# EAGLE board Main_PCB_Prototype_v9 (EAGLE 9.7.0)
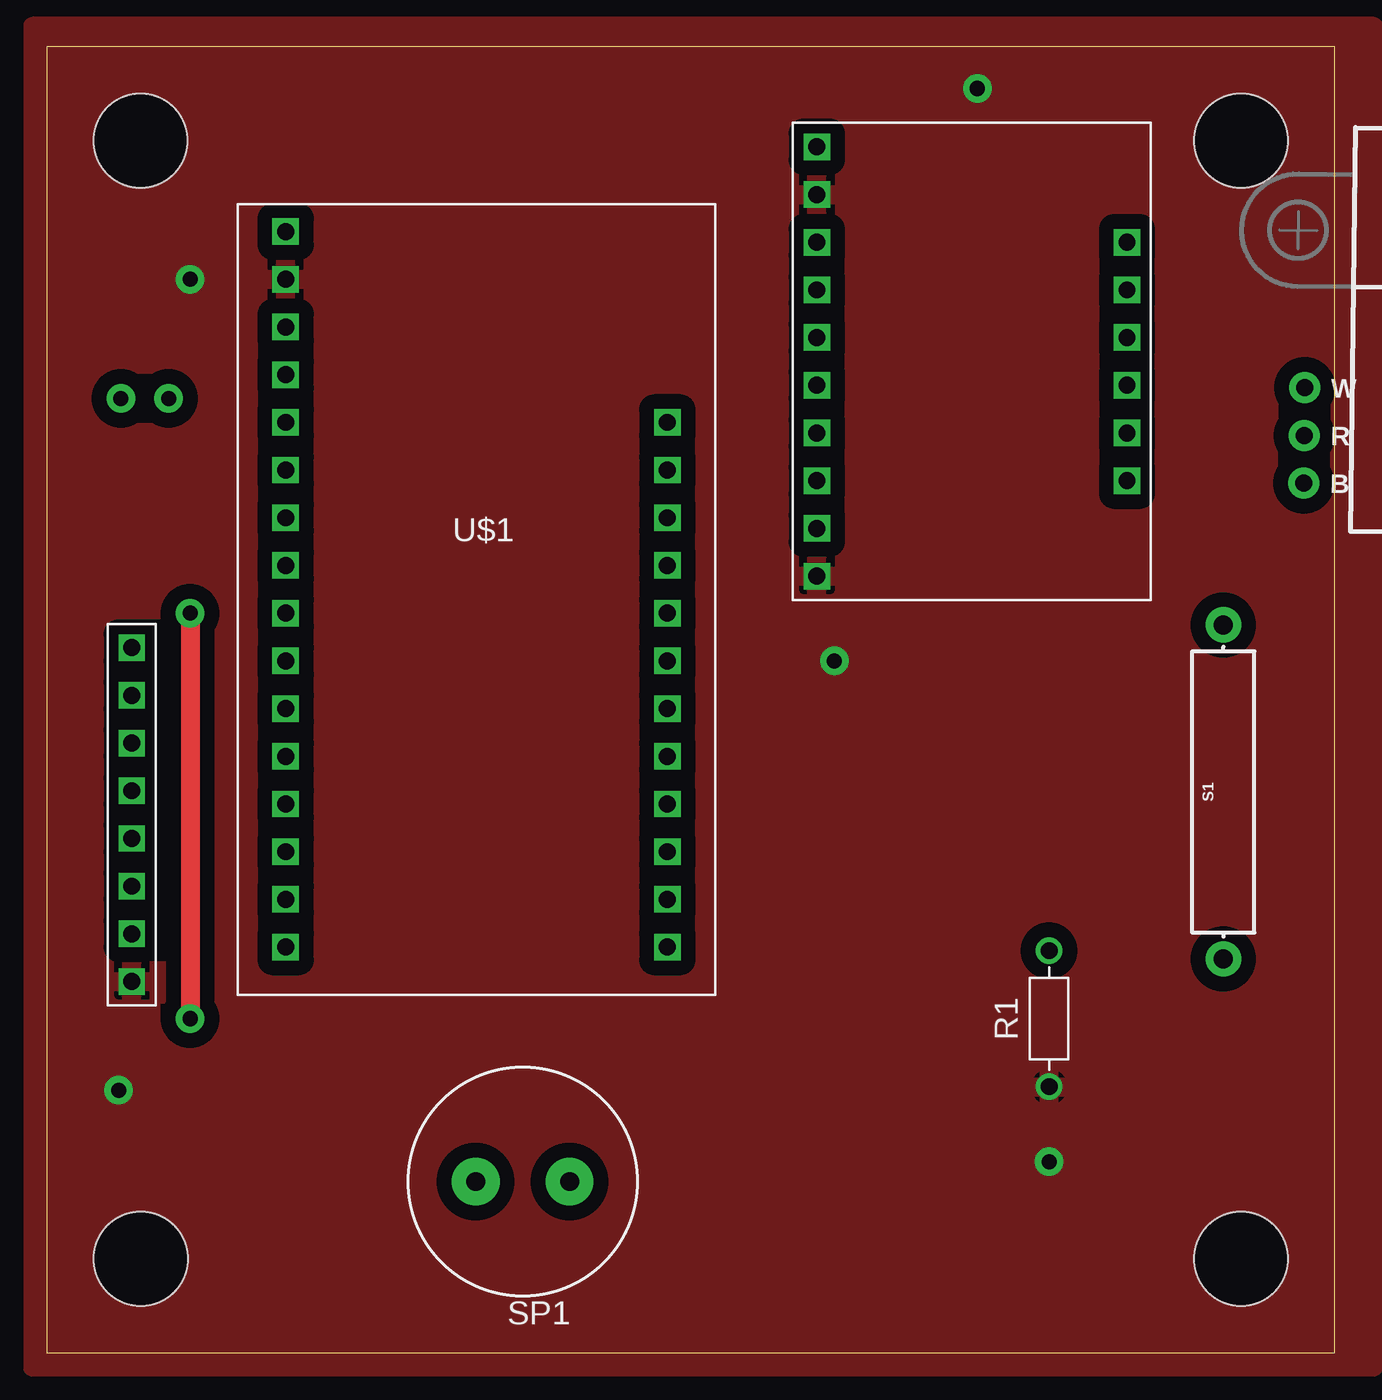
[diagram p0: board, top side]
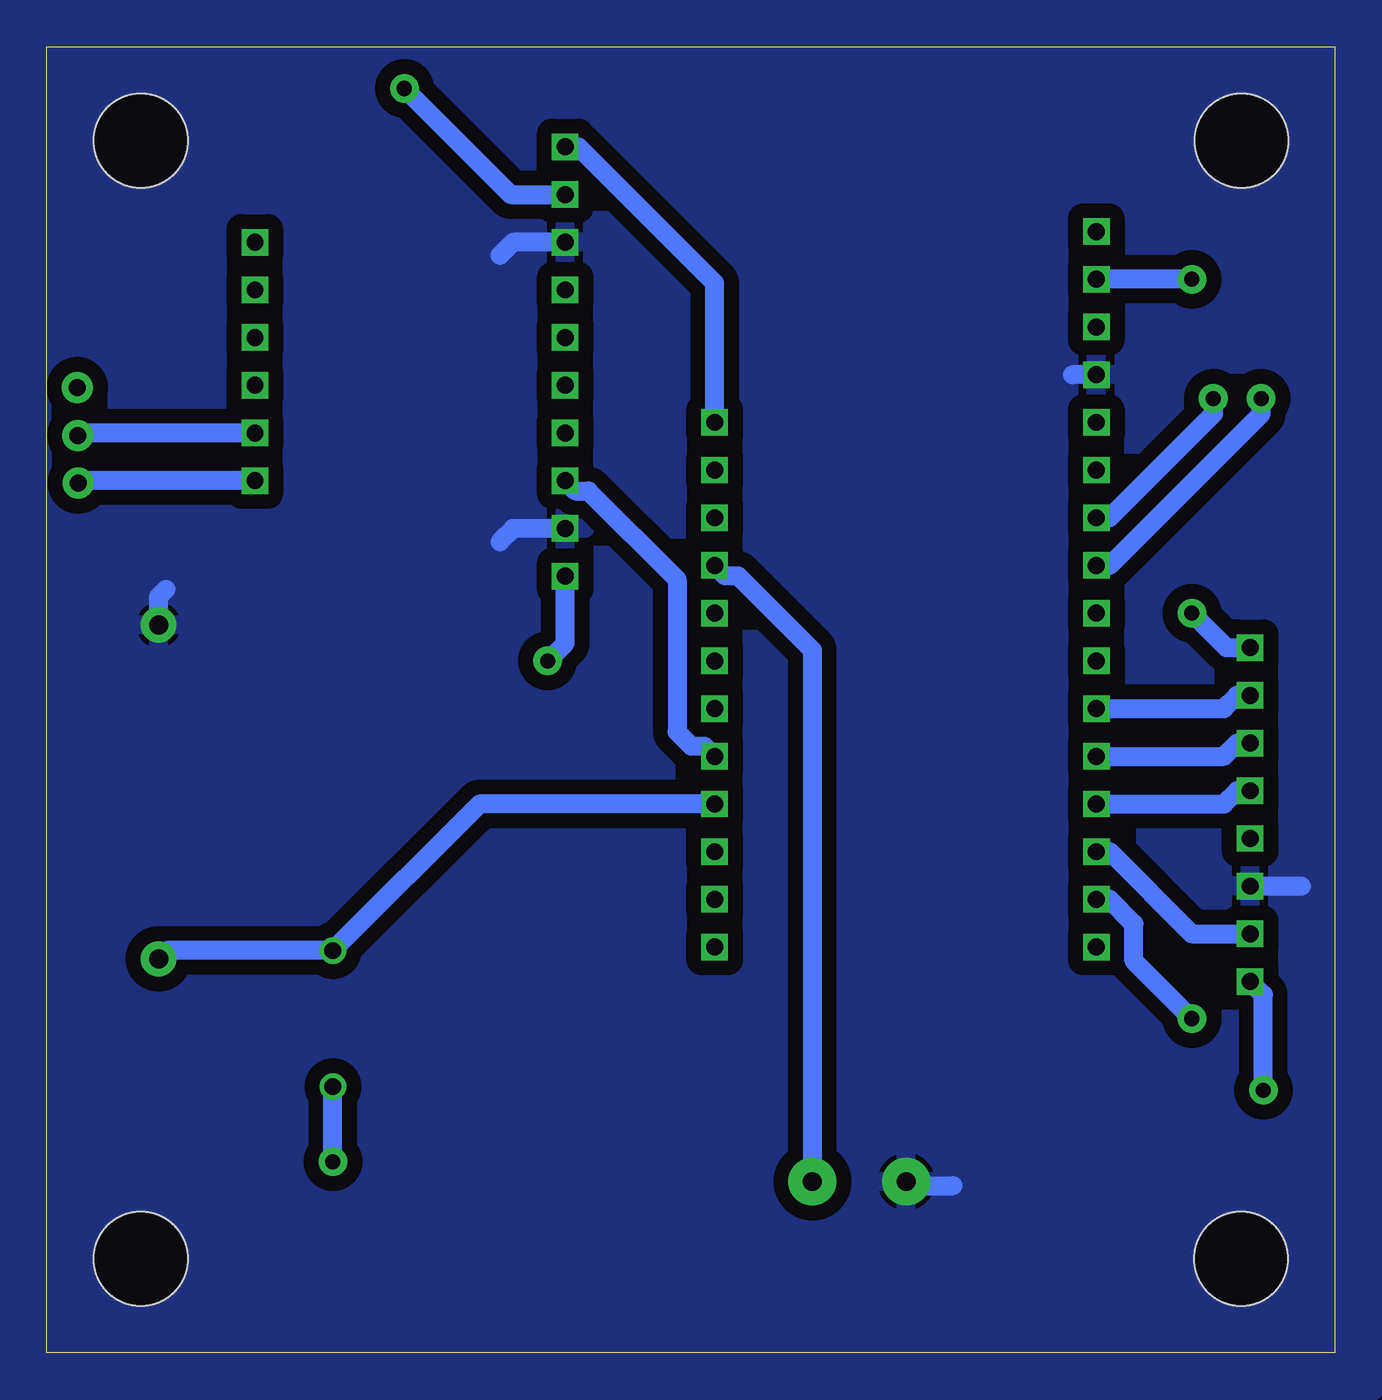
[diagram p1: board, bottom side, seen from below]

Size 68.56 x 69.52 mm. Coordinates in mm from the lower left corner, seen from the top.
Outline: 0,0 68.56,0 68.56,69.52 0,69.52 0,0
Copper layers (1*16): Top 0.035mm / dielectric 1.5mm / Bottom 0.035mm
Design rules "Use_this": minimum track width 8mil, minimum drill 0.8mm, track to track 0.794003125mm, track to pad 0.794003125mm, pad to pad 0.794003125mm, via to via 0.794003125mm, smd to smd 0mil, copper to edge 0mil, drill to drill 1mil, minimum pad ring 10mil, minimum via ring 10mil, stop-mask expansion 1mil, vias tented up to drill 30mil, thermal gap 10mil
Holes 5 mm at 5,5 63.56,64.52 63.56,5 4.97,64.52

## Footprints (pad centres in the part's own frame; a part is rotated, then mirrored left to right if it is on the bottom)
RESAD724W46L381D178B = drill 0.9 pad 1.26: 1 -3.62,0; 2 3.62,0
REED_SWITCH_PLASTIC = drill 1.016 pad 1.88: P$1 -8.89,0; P$2 8.89,0
PS12 = drill 1 pad 2.54: P$1 -2.5,0; P$2 2.5,0
HUZZAH = drill 0.9 pad 1.016 square: 3V3 -7.62,12.7; BAT 12.7,5.08; BLNK -7.62,10.16; D04 -7.62,-7.62; D05 -7.62,-10.16; D12 12.7,-5.08; D13 12.7,-2.54; D14 12.7,-17.78; D15 12.7,-12.7; D16 -7.62,-17.78; D17 -7.62,-20.32; D18 -7.62,-12.7; D19 -7.62,-15.24; D21 -7.62,-22.86; D22 12.7,-20.32; D23 12.7,-22.86; D25 -7.62,2.54; D26 -7.62,5.08; D27 12.7,-7.62; D32 12.7,-15.24; D33 12.7,-10.16; D34 -7.62,0; D36 -7.62,-5.08; D39 -7.62,-2.54; EN 12.7,2.54; GND -7.62,7.62; RST -7.62,15.24; USB 12.7,0
PQ12--R = drill 0.9 pad 1.651: GND -2.54,2.54; PWM -2.54,7.62; VDC -2.54,5.08
RFID = drill 0.9 square: P$1 -1.27,0; P$2 -3.81,0; P$3 -6.35,0; P$4 -8.89,0; P$5 1.27,0; P$6 3.81,0; P$7 6.35,0; P$8 8.89,0
MOTORDRIVER = drill 0.9 square: AIN1 -6.35,-20.32; AIN2 -6.35,-22.86; BIN1 -6.35,-15.24; BIN2 -6.35,-12.7; GND -6.35,-7.62; GND2 10.16,-15.24; GND3 10.16,-12.7; MOTORA+ 10.16,-20.32; MOTORA- 10.16,-17.78; MOTORB+ 10.16,-10.16; MOTORB- 10.16,-7.62; PWMA -6.35,-25.4; PWMB -6.35,-10.16; STBY -6.35,-17.78; VCC -6.35,-5.08; VM -6.35,-2.54

## Placement (x,y rotation side)
R1  [RESAD724W46L381D178B]  53.34,17.78 90 top
S1  REED_SWITCH-PTH-INSULATED  [REED_SWITCH_PLASTIC]  62.62,29.85 90 top
SP1  SPEAKER/PS12  [PS12]  25.32,9.1 180 top
U$1  ADAFRUIT_ESP32_HUZZAH  [HUZZAH]  20.32,44.45 0 top
U$2  MICRO-ACTUATOR-PQ12-100-6-R  [PQ12--R]  69.4,43.72 359.3 top
U$3  RFID  [RFID]  4.51,28.64 270 top
U$4  MOTORDRIVER  [MOTORDRIVER]  47.33,66.74 0 top

## Library data of the parts
R1 = Library; CATEGORY: Resistor; SUB-CATEGORY: Fixed
S1 = SparkFun-Switches; PROD_ID: SWCH-10467; SF_SKU: COM-10601
SP1 = adafruit
U$1 U$3 U$4 = Skarin_Sam_388.lib
U$2 = SparkFun-Electromechanical; GEAR_RATIO: 100:1; PROD_ID: ROB-18591; VOLTAGE: 6V; WIRING: -R (Servo)

## Nets
3V3: R1.1 U$1.3V3 U$3.P$8 U$4.PWMA U$4.VCC
BAT: U$1.BAT U$4.VM
GND: S1.P$2 SP1.P$2 U$1.GND U$3.P$6 U$4.AIN2 U$4.GND
MOTORA+: U$2.GND U$4.MOTORA+
MOTORA-: U$2.VDC U$4.MOTORA-
N$4: U$1.D17 U$3.P$4
N$5: R1.2 S1.P$1 U$1.D32
N$6: U$1.D18 U$3.P$2
N$7: U$1.D15 U$4.AIN1
N$9: U$1.D19 U$3.P$1
N$10: U$1.D16 U$3.P$7
N$11: U$1.D05 U$3.P$3
N$17: SP1.P$1 U$1.D13
TILTSENSOR1: U$1.D39
TILTSENSOR2: U$1.D34

## Tracks (layer width: path | path; a pad name or v marks a point on that pad's centre or on a via)
3V3  (via drill 0.8 pad 1.52)
  Bottom 1: v7.62,57.15 U$1.3V3 | v53.34,10.16 R1.1 | v3.81,13.97 3.81,19.05 U$3.P$8 | v49.53,67.31 43.88,61.66 U$4.VCC | v41.91,36.83 40.98,37.76 U$4.PWMA
  pour Top: -0.77,-0.77 70.62,-0.77 70.62,70.62 -0.77,70.62
BAT
  Bottom 1: U$4.VM 40.28,64.2 33.02,56.94 U$1.BAT
GND
  Bottom 1: U$4.AIN2 43.75,43.88 44.45,43.18 | U$4.GND 43.75,59.12 44.45,58.42 | S1.P$2 62.62,40.25 62.23,40.64 | SP1.P$2 22.61,8.89 20.32,8.89 | U$1.GND 13.97,52.07 | U$3.P$6 1.77,24.83
  pour Bottom: -2.04,-2.04 71.89,-2.04 71.89,71.89 -2.04,71.89
MOTORA+
  Bottom 1: U$4.MOTORA+ 66.76,46.42 U$2.GND
MOTORA-
  Bottom 1: U$4.MOTORA- 66.79,48.96 U$2.VDC
N$4  (via drill 0.8 pad 1.52)
  Top 1: v7.62,39.37 v7.62,17.78
  Bottom 1: U$1.D17 12,24.13 10.7,22.83 10.7,20.86 v7.62,17.78 | v7.62,39.37 5.78,37.53 U$3.P$4
N$5
  Bottom 1: S1.P$1 62.19,21.4 R1.2 45.53,29.21 U$1.D32
N$6
  Bottom 1: U$1.D18 5.92,31.75 5.21,32.45 U$3.P$2
N$7
  Bottom 1: U$4.AIN1 40.44,45.88 39.74,45.88 35.02,41.16 35.02,33.05 34.26,32.29 33.56,32.29 U$1.D15
N$9
  Bottom 1: U$1.D19 5.92,29.21 5.21,29.91 U$3.P$1
N$10
  Bottom 1: U$1.D16 12,26.67 7.63,22.29 U$3.P$7
N$11
  Bottom 1: U$1.D05 5.92,34.29 5.21,34.99 U$3.P$3
N$17
  Bottom 1: U$1.D13 32.48,41.37 31.78,41.37 27.82,37.41 SP1.P$1
TILTSENSOR1  (via drill 0.8 pad 1.52)
  Bottom 1: U$1.D39 12,41.91 3.94,49.97 v3.94,50.8
TILTSENSOR2  (via drill 0.8 pad 1.52)
  Bottom 1: U$1.D34 12,44.45 6.48,49.97 v6.48,50.8